# Altium PCB PCB1.pcbdoc
Units mil, origin at the board's own origin, x right, y up, seen from the top; angles counter-clockwise.
Board outline 6000 x 4000 mil, 2 copper layers (Top Layer, Bottom Layer); 25 components, 0 nets, 168 pads, 7 vias.
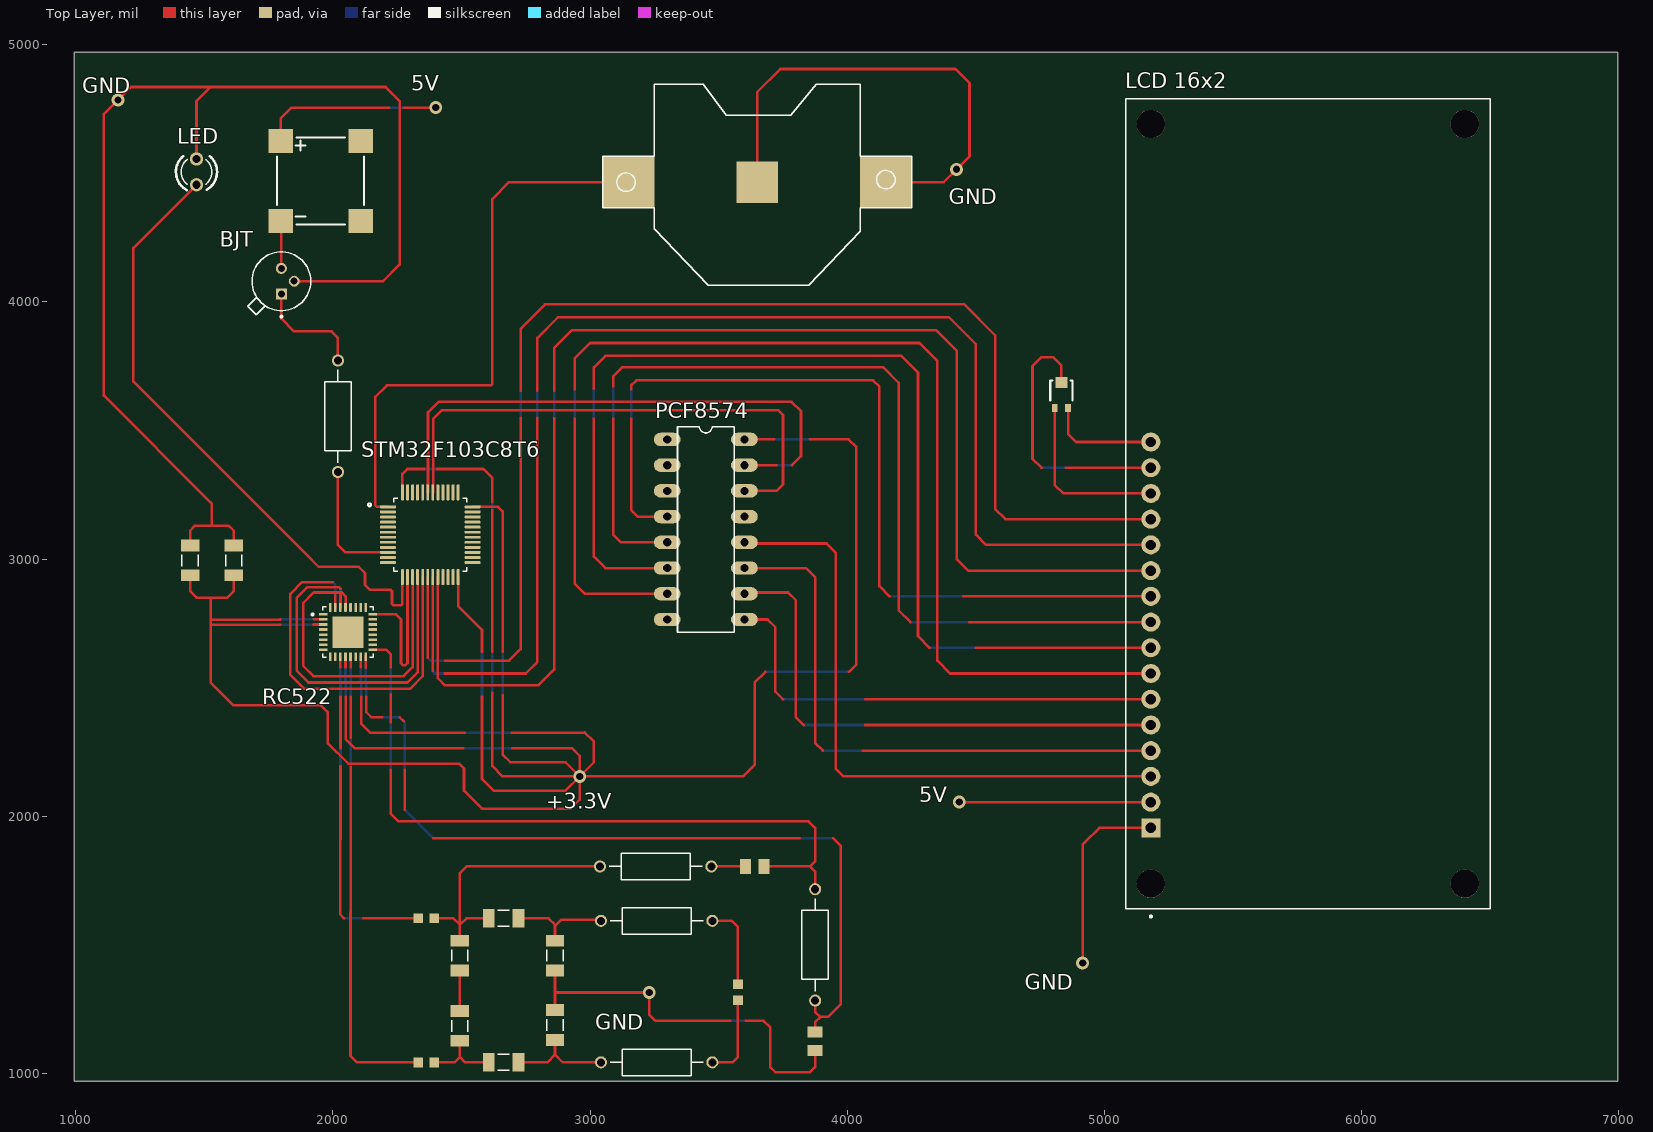
[diagram p0: Top Layer view]
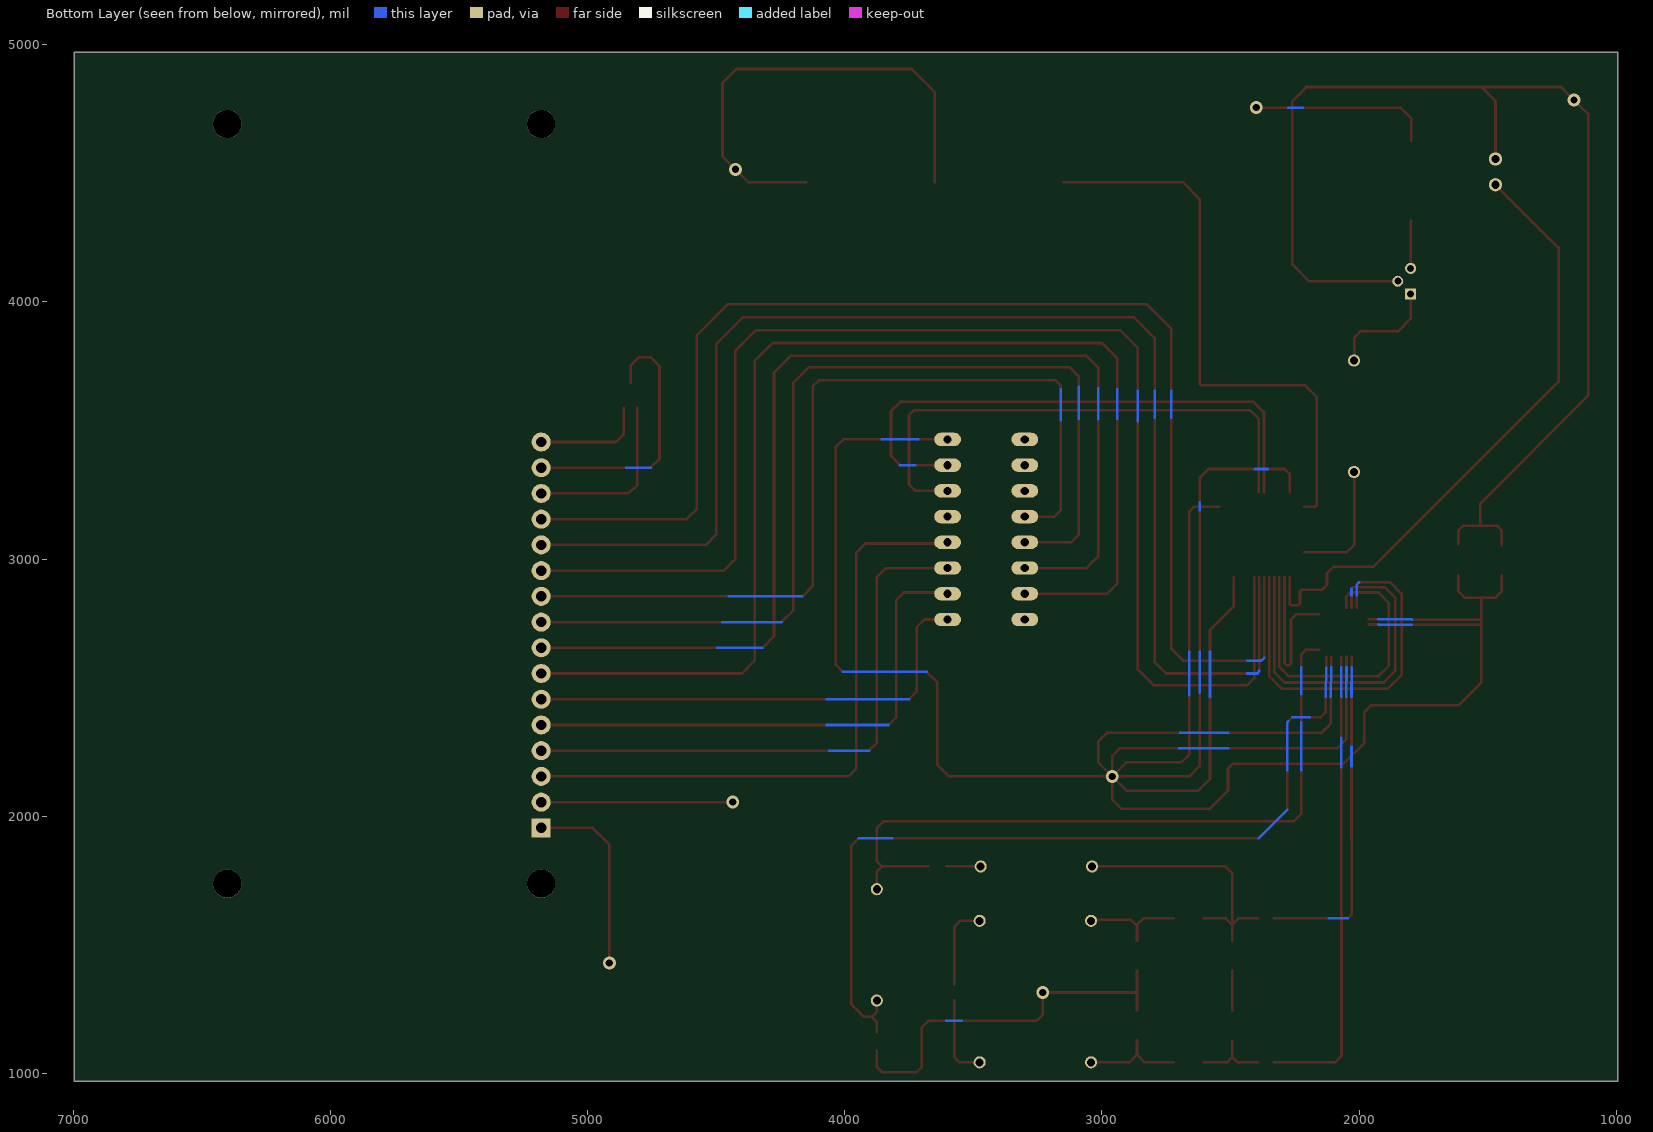
[diagram p1: Bottom Layer view, seen from below]

## Layer stack, top to bottom
Top Solder: solder mask 0.4, Solder Resist, Dk 3.5
Top Layer: signal copper 1.4
Dielectric 1: dielectric 12.6, FR-4, Dk 4.8
Bottom Layer: signal copper 1.4
Bottom Solder: solder mask 0.4, Solder Resist, Dk 3.5

## Board outline
995,970 6995,970 6995,4970 995,4970

## Design rules (kind name [scope] priority, off if disabled: settings)
Clearance [All] p1: gap=10 ignorepadtopadclearanceinfootprint=FALSE except(0: Arc-Hole Track-Hole SMDPad-Hole THPad-Hole Via-Hole Fill-Hole Poly-Hole Region-Hole Text-Hole)
PolygonConnect [All] p1: connectstyle=Relief reliefconductorwidth=10 reliefentries=4 polygonreliefangle="90 Angle" airgapwidth=10
RoutingVias [All] p1: holewidth=28 width=50 viastyle="Through Hole" minholewidth=28 minwidth=50 maxholewidth=28 maxwidth=50
SolderMaskExpansion [All] p1: expansion=4 istentingtop=FALSE
Width [All] p1: maxlimit=10 minlimit=10 preferedwidth=10
30 further rules are at their usual default settings.

## Components (designator, comment, footprint, x,y, rotation, side; value= is the part's Value field where it differs from the comment)
BJT "Comment" TO127P580H530-3 1800,4080 r90 top
"LCD 16x2" "Comment" MODULE_LCD-16X2 5790.24,3214.84 r90 top
LED "Comment" LED3MM 1470,4505 r90 top
PCF8574 "Comment" *DIL16 3450,3115 r270 top
RC522 "Comment" QFN50P500X500X100-33N 2059.13,2716.1 r0 top
STM32F103C8T6 "Comment" QFP50P900X900X160-48N 2378.9,3094.57 r0 top
? "Comment" CR2032-SMD 3650,4465 r0 top
? "Comment" RESAD1100W55L680D260 3875,1500 r90 top
? "Comment" CAPC2012X100N 3875,1125 r90 top
? "Comment" CAPC2012X100N 3640,1805 r0 top
? "Comment" RESAD1100W55L680D260 3255,1805 r0 top
? "Comment" INDC1608X95N 3575,1315 r90 top
? "Comment" RESAD1100W55L680D260 3258.87,1043.41 r0 top
? "Comment" RESAD1100W55L680D260 3258.87,1593.41 r0 top
? "Comment" CAPC3216X120N 2493.87,1185.34 r90 top
? "Comment" CAPC3216X120N 2493.87,1458.41 r90 top
? "Comment" CAPC3216X120N 2863.87,1188.41 r90 top
? "Comment" CAPC3216X120N 2863.87,1458.41 r90 top
? "Comment" CAPC3216X120N 2663.87,1043.41 r0 top
? "Comment" CAPC3216X120N 2663.87,1603.41 r0 top
? "Comment" INDC1608X95N 2363.87,1043.41 r0 top
? "Comment" INDC1608X95N 2363.87,1603.41 r0 top
? "Comment" CAPC3216X120N 1615,2995 r90 top
? "Comment" CAPC3216X120N 1445,2995 r90 top
? "Comment" RESAD1100W55L680D260 2020,3555 r90 top

## Footprints (in the part's own frame and the unit in brackets; to place one, negate y for a bottom-side part, rotate by r counter-clockwise, add the part's x,y. Pads: shape width x height; smd on the part's side, far side on the other; paste and mask are expansions set on the pad)
*DIL16 [mil]
  oval 52x104 hole 32: 1(-350,-150) 2(-250,-150) 3(-150,-150) 4(-50,-150) 5(50,-150) 6(150,-150) 7(250,-150) 8(350,-150) 9(350,150) 10(250,150) 11(150,150) 12(50,150) 13(-50,150) 14(-150,150) 15(-250,150) 16(-350,150)
  silkscreen extent -400,-110 400,110
CAPC2012X100N [mm]
  rect 1.1x1.47 smd: 1(-0.909,0) 2(0.909,0)
  body extent -1,-0.63 1,0.63, height 1
CAPC3216X120N [mm]
  rect 1.16x1.82 smd: 1(-1.475,0) 2(1.475,0)
  silkscreen extent -0.57,-0.8 0.57,0.8, body extent -1.6,-0.8 1.6,0.8, height 1.8
CR2032-SMD [mil]
  rect 200x200 smd: +$1(-500,0) +$2(500,0)
  rect 160x160 smd: NEG(0,0)
  silkscreen extent -600,-400 600,380
INDC1608X95N [mm]
  rect 0.94x0.97 smd: 1(-0.79,0) 2(0.79,0)
  body extent -0.8,-0.4 0.8,0.4, height 0.4
LED3MM [mil]
  round 52 hole 32: A(-50,0) K(50,0)
  silkscreen extent -71,-80 61,80, body extent -60,-62 60,62, height 240
MODULE_LCD-16X2 [mm]
  rect 1.88x1.88 / inner round 1.88 / far side rect 1.88x1.88 hole 1.016: 1(-32,15.5)
  round 1.88 hole 1.016: 2(-29.46,15.5) 3(-26.92,15.5) 4(-24.38,15.5) 5(-21.84,15.5) 6(-19.3,15.5) 7(-16.76,15.5) 8(-14.22,15.5) 9(-11.68,15.5) 10(-9.14,15.5) 11(-6.6,15.5) 12(-4.06,15.5) 13(-1.52,15.5) 14(1.02,15.5) 15(3.56,15.5) 16(6.1,15.5)
  round 2.8 hole 2.8 unplated: ""(-37.5,-15.5) ""(-37.5,15.5) ""(37.5,-15.5) ""(37.5,15.5)
  silkscreen extent -40.85,-18 40,18
QFN50P500X500X100-33N [mm]
  rrect25% 0.86x0.26 smd: 1(-2.435,1.75) 2(-2.435,1.25) 3(-2.435,0.75) 4(-2.435,0.25) 5(-2.435,-0.25) 6(-2.435,-0.75) 7(-2.435,-1.25) 8(-2.435,-1.75) 17(2.435,-1.75) 18(2.435,-1.25) 19(2.435,-0.75) 20(2.435,-0.25) 21(2.435,0.25) 22(2.435,0.75) 23(2.435,1.25) 24(2.435,1.75)
  rrect25% 0.26x0.86 smd: 9(-1.75,-2.435) 10(-1.25,-2.435) 11(-0.75,-2.435) 12(-0.25,-2.435) 13(0.25,-2.435) 14(0.75,-2.435) 15(1.25,-2.435) 16(1.75,-2.435) 25(1.75,2.435) 26(1.25,2.435) 27(0.75,2.435) 28(0.25,2.435) 29(-0.25,2.435) 30(-0.75,2.435) 31(-1.25,2.435) 32(-1.75,2.435)
  rect 3.1x3.1 smd paste-3: 33(0,0)
  silkscreen extent -3.59,-2.5 2.5,2.5
QFP50P900X900X160-48N [mm]
  rrect50% 1.56x0.28 smd: 1(-4.18,2.75) 2(-4.18,2.25) 3(-4.18,1.75) 4(-4.18,1.25) 5(-4.18,0.75) 6(-4.18,0.25) 7(-4.18,-0.25) 8(-4.18,-0.75) 9(-4.18,-1.25) 10(-4.18,-1.75) 11(-4.18,-2.25) 12(-4.18,-2.75) 25(4.18,-2.75) 26(4.18,-2.25) 27(4.18,-1.75) 28(4.18,-1.25) 29(4.18,-0.75) 30(4.18,-0.25) 31(4.18,0.25) 32(4.18,0.75) 33(4.18,1.25) 34(4.18,1.75) 35(4.18,2.25) 36(4.18,2.75)
  rrect50% 0.28x1.56 smd: 13(-2.75,-4.18) 14(-2.25,-4.18) 15(-1.75,-4.18) 16(-1.25,-4.18) 17(-0.75,-4.18) 18(-0.25,-4.18) 19(0.25,-4.18) 20(0.75,-4.18) 21(1.25,-4.18) 22(1.75,-4.18) 23(2.25,-4.18) 24(2.75,-4.18) 37(2.75,4.18) 38(2.25,4.18) 39(1.75,4.18) 40(1.25,4.18) 41(0.75,4.18) 42(0.25,4.18) 43(-0.25,4.18) 44(-0.75,4.18) 45(-1.25,4.18) 46(-1.75,4.18) 47(-2.25,4.18) 48(-2.75,4.18)
  silkscreen extent -6.15,-3.6 3.6,3.6, body extent -4.5,-4.5 4.5,4.5, height 1.6
RESAD1100W55L680D260 [mm]
  round 1.2 hole 0.8: 1(-5.5,0) 2(5.5,0)
  silkscreen extent -4.58,-1.3 4.58,1.3, body extent -5.77,-1.2 5.77,1.2, height 2.4
TO127P580H530-3 [mm]
  rect 1.09x1.09 / inner round 1.09 / far side rect 1.09x1.09 hole 0.69: 1(-1.27,0)
  round 1.09 hole 0.69: 2(0,-1.27) 3(1.27,0)
  silkscreen extent -3.6,-2.9 2.9,3.31, body extent -3.27,-2.9 2.9,3.27, height 18

## Free pads (board coordinates)
  rect 22.64x31.5 smd: 1(4806.24,3587.95) 3(4858.41,3587.95)
  rect 47.24x43.31 smd: 2(4832.32,3686.38)
  rect 94.49x94.49 smd: +(1797.09,4625.51) -(1797.09,4314.49) NC(2108.11,4314.49) NC(2108.11,4625.51)

## Via types
v1: diameter 50, hole 28, Top Layer to Bottom Layer, 6 vias
v2: diameter 50/50 (per signal layer), hole 28, Top Layer to Bottom Layer, 1 vias

## Nets (pads, with @x,y where several pads share a name; then routed paths per layer and width w, separated by ;. In a path a pad name is that pad's centre, name@x,y a point inside that pad or via, vN(x,y) a via of type N, cw(c..) or ccw(c..) an arc to the next point about the centre after c; other vN are vias at no path point)
pads on no net: "LCD 16x2.1" "LCD 16x2.2" "LCD 16x2.3" "LCD 16x2.4" "LCD 16x2.5" "LCD 16x2.6" "LCD 16x2.7" "LCD 16x2.8" "LCD 16x2.9" "LCD 16x2.10" "LCD 16x2.11" "LCD 16x2.12" "LCD 16x2.13" "LCD 16x2.14" "LCD 16x2.15" "LCD 16x2.16" "LCD 16x2." ?.1 ?.2 ?.+$1 ?.+$2 ?.NEG BJT.1 BJT.2 BJT.3 LED.A LED.K PCF8574.1 PCF8574.2 PCF8574.3 PCF8574.4 PCF8574.5 PCF8574.6 PCF8574.7 PCF8574.8 PCF8574.9 PCF8574.10 PCF8574.11 PCF8574.12 PCF8574.13 PCF8574.14 PCF8574.15 PCF8574.16 RC522.1 RC522.2 RC522.3 RC522.4 RC522.5 RC522.6 RC522.7 RC522.8 RC522.9 RC522.10 RC522.11 RC522.12 RC522.13 RC522.14 RC522.15 RC522.16 RC522.17 RC522.18 RC522.19 RC522.20 RC522.21 RC522.22 RC522.23 RC522.24 RC522.25 RC522.26 RC522.27 RC522.28 RC522.29 RC522.30 RC522.31 RC522.32 RC522.33 STM32F103C8T6.1 STM32F103C8T6.2 STM32F103C8T6.3 STM32F103C8T6.4 STM32F103C8T6.5 STM32F103C8T6.6 STM32F103C8T6.7 STM32F103C8T6.8 STM32F103C8T6.9 STM32F103C8T6.10 STM32F103C8T6.11 STM32F103C8T6.12 STM32F103C8T6.13 STM32F103C8T6.14 STM32F103C8T6.15 STM32F103C8T6.16 STM32F103C8T6.17 STM32F103C8T6.18 STM32F103C8T6.19 STM32F103C8T6.20 STM32F103C8T6.21 STM32F103C8T6.22 STM32F103C8T6.23 STM32F103C8T6.24 STM32F103C8T6.25 STM32F103C8T6.26 STM32F103C8T6.27 STM32F103C8T6.28 STM32F103C8T6.29 STM32F103C8T6.30 STM32F103C8T6.31 STM32F103C8T6.32 STM32F103C8T6.33 STM32F103C8T6.34 STM32F103C8T6.35 STM32F103C8T6.36 STM32F103C8T6.37 STM32F103C8T6.38 STM32F103C8T6.39 STM32F103C8T6.40 STM32F103C8T6.41 STM32F103C8T6.42 STM32F103C8T6.43 STM32F103C8T6.44 STM32F103C8T6.45 STM32F103C8T6.46 STM32F103C8T6.47 STM32F103C8T6.48
copper on no net: | length 93952
  Top Layer w10: 1445,2936.93 1445,2875 1470,2850 1575,2850 1590,2850 1615,2875 1615,2936.93 ; 1445,3053.07 1445,3110 1465,3130 1540,3130 1595,3130 1615,3110 1615,3057.48 ; 1470,4455 1225,4210 1225,3690 1895,3020 1945,2970 2010,2970 2100,2970 2125,2945 2125,2900 2145,2880 2224.14,2880 2230,2874.14 2230,2825.86 2235.86,2820 2264.77,2820 2270.63,2825.86 2270.63,2930 ; 1470,4555 1470,4780 1525,4835 ; 1525,2745 1795,2745 ; 1525,2749.66 1525,2519.6 1612.57,2432.03 1952.97,2432.03 1980,2405 1980,2285 2060,2205 2490,2205 2510,2185 2510,2100 2580,2030 2925,2030 2960,2065 v2(2960,2155) ; 1525,2750 1525,2758.28 ; 1525,2850 1525,2758.28 ; 1530,3130 1530,3215 1525,3220 1110,3635 1110,4730 v1(1165,4785) 1215,4835 1290,4835 1525,4835 ; 1795,2765 1530.86,2764.14 1525,2758.28 ; 1797.09,4314.49 1800,4311.57 1800,4215.83 1800,4130 ; 1797.09,4625.51 1797.09,4712.09 1840,4755 2220,4755 ; 1800,4030 1800,3935 1850,3885 1995,3885 2020,3860 2020,3771.54 ; 1850,4080 2195,4080 2260,4145 2260,4780 2205,4835 1525,4835 ; 1925,2745.63 1963.27,2745.63 ; 1925.32,2765.32 1963.27,2765.32 ; 2000,2910 1880,2910 1835,2865 1835,2550 1890,2495 2300,2495 2349.37,2544.37 2349.37,2930 ; 2010,2810 2010,2860 ; 2010,2890 2024.14,2890 ; 2015,2890 1945,2890 1900,2890 1860,2850 1860,2565 1905,2520 2290,2520 2329.68,2559.68 2329.68,2930 ; 2020,3338.46 2020,3283.46 2020,3055 2049.33,3025.67 2214.33,3025.67 ; 2025,2890 2030,2885 ; 2029.61,2580 2029.61,2620.24 ; 2030,2195 2028.87,1618.41 2043.89,1603.39 ; 2030,2265 2030,2465 ; 2030,2810 2030,2860 ; 2049.29,2580 2049.29,2620.24 ; 2050,2465 2050,2300 2085,2265 2506.69,2265 ; 2050,2810 2050,2855 2035,2870 1925,2870 1885,2830 1885,2585 1925,2545 2275,2545 2310,2580 2310,2930 ; 2068.98,2578.98 2068.98,2620.24 ; 2070,2190 2068.87,1068.41 2093.87,1043.41 2293.87,1043.41 ; 2070,2305 2070,2465 ; 2108.35,2580 2108.35,2620.24 ; 2110,2465 2110,2360 2145,2325 2513.3,2325 ; 2118.87,1603.41 2198.87,1603.41 2268.87,1603.41 2332.77,1603.41 ; 2128.03,2578.03 2128.03,2620.24 ; 2130,2465 2130,2405 2150,2385 2192.25,2385 ; 2155,2647.2 2207.8,2647.2 2225,2630 2225,2580 ; 2155,2785 2205,2785 2235,2785 2245.86,2785 2265,2765.86 2265,2595 2273.36,2586.64 2281.64,2586.64 2290.31,2595.31 2290.31,2930 ; 2214.33,3202.83 2170.86,3202.83 2165,3208.69 2165,3630 2210,3675 2614.14,3675 2620,3680.86 2620,4400 2685,4465 2975,4465 3150,4465 ; 2225,2180 2225,2010 2255,1980 2315,1980 3850,1980 3875,1955 3875,1825 3855,1805 ; 2225,2365 2225,2475 ; 2260,2385 2275,2370 ; 2270.63,3259.13 2270.63,3330.63 2290,3350 2355,3350 ; 2275,4755 v1(2400,4755) ; 2280,2025 2280,2180 ; 2288.87,1043.41 2332.77,1043.41 ; 2369.06,2615.94 2369.06,2630.94 2369.06,2930 ; 2370,3260 2370,3570 2411.33,3611.33 3783.67,3611.33 3820,3575 3820,3410 3820,3400 3785,3365 ; 2388.74,2565 2388.74,2930 ; 2390,1915 3815,1915 ; 2390,3260 2390,3545 2424.04,3579.04 3730.96,3579.04 3750,3560 3750,3290 3725,3265 3600,3265 ; 2394.97,1043.41 2473.87,1043.41 2493.87,1063.41 ; 2394.97,1603.41 2468.87,1603.41 2493.87,1578.41 ; 2405,3350 2585,3350 2620,3315 2620,3220 ; 2408.43,2930 2408.43,2536.57 2435,2510 2800,2510 2860,2570 2860,3546.27 ; 2435,2555 2750,2555 2795,2600 2795,3548.86 ; 2436.45,2605 2685,2605 2730,2650 2730,3549.12 ; 2487.17,2930 2487.17,2817.83 2580,2725 2580,2640 ; 2493.87,1127.27 2493.87,1063.41 ; 2493.87,1243.41 2493.87,1288.41 2493.87,1400.34 ; 2493.87,1516.48 2493.87,1578.41 ; 2543.46,3202.83 2642.17,3202.83 2660,3185 2660,2640 ; 2580,2465 2580,2145 2625,2100 2905,2100 v2(2960,2155) ; 2605.8,1043.41 2513.87,1043.41 2493.87,1063.41 ; 2605.8,1603.41 2518.87,1603.41 2493.87,1578.41 ; 2620,2480 2620,2195 2660,2155 v2(2960,2155) ; 2620,2640 2620,3190 ; 2660,2470 2660,2240 2690,2210 2905,2210 v2(2960,2155) ; 2695,2325 2978.91,2325 ; 2698.43,2265 2930,2265 2960,2235 2960,2195 v2(2960,2155) ; 2721.94,1043.41 2833.87,1043.41 2863.87,1073.41 ; 2721.94,1603.41 2838.87,1603.41 2863.87,1578.41 2863.87,1573.41 ; 2730,3655.08 2730,3895 2825,3990 4455,3990 4575,3870 4575,3195 4615,3155 5180,3155 ; 2795,3655.08 2795,3860 2875,3940 4395,3940 4500,3835 4500,3095 4540,3055 5180,3055 ; 2860,3655 2860,3820 2930,3890 4345,3890 4425,3810 4425,3000 4470,2955 5180,2955 ; 2863.87,1130.34 2863.87,1073.41 ; 2863.87,1246.48 2863.87,1298.41 2863.87,1323.41 2863.87,1400.34 ; 2863.87,1315 v1(3230,1315) 3230,1230 3255,1205 3545,1205 ; 2863.87,1516.48 2863.87,1573.41 ; 2940,3545 2940,2905 2980,2865 3300,2865 ; 2940,3660 2940,3780 3000,3840 4280,3840 4350,3770 4350,2605 4400,2555 5180,2555 ; 2978.91,2326.09 3015,2290 3015,2210 v2(2960,2155) ; 3015,3545 3015,3010 3060,2965 3300,2965 ; 3015,3662.99 3015,3745 3060,3790 4210,3790 4275,3725 4275,2700 4320,2655 ; 3038.46,1805 2885,1805 2520,1805 2493.87,1778.87 2493.87,1578.41 ; 3042.33,1043.41 2978.87,1043.41 2893.87,1043.41 2863.87,1073.41 ; 3042.33,1593.41 3037.33,1598.41 2988.87,1598.41 2888.87,1598.41 2863.87,1573.41 ; 3090,3545 3090,3095 3120,3065 3300,3065 ; 3090,3671.08 3090,3710 3125,3745 4140,3745 4200,3685 4200,2800 4245,2755 ; 3160,3544.77 3160,3190 3185,3165 3300,3165 ; 3160,3661.16 3160,3675 3180,3695 4100,3695 4125,3670 4125,2897.29 ; 3471.54,1805 3560,1805 3604.21,1805 ; 3475.4,1043.41 3553.41,1043.41 3575,1065 3575,1283.9 ; 3475.4,1593.41 3551.59,1593.41 3575,1570 3575,1565 3575,1346.1 ; 3600,2765 3690,2765 3720,2735 3720,2485 3750,2455 ; 3600,2965 3840,2965 3875,2930 3875,2285 3905,2255 ; 3600,3065 3604.49,3060.51 3919.49,3060.51 3955,3025 3955,2355 3955,2255 3955,2185 3985,2155 5180,2155 ; 3600,3365 3725,3365 ; 3600,3465 3715,3465 ; 3605,1205 3675,1205 3700,1180 3700,1025 3720,1005 3855,1005 3875,1025 3875,1089.21 ; 3605,2870 3770,2870 3800.16,2839.84 3800.16,2390 3800.16,2384.84 3830,2355 ; 3650,4465 3650,4815 3740,4905 4420,4905 4475,4850 4475,4565 v1(4425,4515) 4375,4465 4150,4465 ; 3675.79,1805 3855,1805 ; 3681.55,2561.55 3640,2520 3640,2200 3595,2155 2970.82,2155 v2(2960,2155) ; 3855,3465 4005,3465 4035,3435 4035,2590 4006.55,2561.55 ; 3875,1160.79 3875,1200 3895,1220 ; 3875,1283.46 3875,1240 3895,1220 ; 3875,1716.54 3875,1785 3855,1805 ; 3945,1915 3975,1885 3975,1270 3925,1220 3895,1220 ; 4060,2255 5180,2255 ; 4070,2355 5180,2355 ; 4070,2455 5180,2455 ; 4125,2895 4165,2855 ; v1(4435,2055) 5180,2055 ; 4450,2855 5180,2855 ; 4475,2755 5180,2755 ; 4500,2655 5180,2655 ; 4720,3390 4720,3750 4755,3785 4800,3785 4832.32,3752.68 4832.32,3686.38 ; 4720.77,3389.23 4755,3355 ; 4806.24,3587.95 4806.24,3288.76 4840,3255 5180,3255 ; 4850,3355 5180,3355 ; 4858.41,3587.95 4858.41,3486.59 4890,3455 5180,3455 ; v1(4915,1430) 4915,1890 4925,1900 4980,1955 5180,1955
  Bottom Layer w10: 1795,2745 1925,2745.63 ; 1795,2765 1925.32,2765.32 ; 2000,2910 2010,2900 2010,2860 ; 2029.29,2580 2030,2465 ; 2030,2195 2030,2270 ; 2030,2860 2030,2885 ; 2043.89,1603.39 2118.87,1603.41 ; 2049.29,2580 2050,2465 ; 2068.98,2578.98 2070,2465 ; 2070,2190 2070,2255 2070,2305 ; 2108.35,2580 2110,2465 ; 2128.03,2578.03 2130,2465 ; 2191.64,2385 2255,2385 2260,2385 ; 2220,4755 2275,4755 ; 2225,2180 2225,2365 ; 2225,2475 2225,2580 ; 2275,2370 2280,2365 2280,2180 ; 2280,2025 2390,1915 ; 2355,3350 2405,3350 ; 2369.06,2615.94 2380,2605 2435,2605 ; 2388.74,2565 2395,2555 2435,2555 ; 2508.43,2265 2698.43,2265 ; 2510,2325 2695,2325 ; 2580,2465 2580,2640 ; 2620,2480 2620,2640 ; 2620,3190 2620,3220 ; 2660,2470 2660,2640 ; 2730,3550 2730,3655.08 ; 2795,3550 2795,3655.08 ; 2860,3535 2860,3655 ; 2940,3545 2940,3660 ; v2@2955,2155 v2(2960,2155) v2@2970.82,2155 ; 3015,3542.99 3015,3662.99 ; 3090,3545 3090,3669.57 ; 3160,3540 3160,3660 ; 3545,1205 3605,1205 ; 3600,2865 3605,2870 ; 3681.55,2561.55 4006.55,2561.55 ; 3715,3465 3855,3465 ; 3725,3365 3785,3365 ; 3750,2455 4070,2455 ; 3815,1915 3945,1915 ; 3830,2355 4070,2355 ; 3905,2255 4060,2255 ; 4165,2855 4175,2855 4450,2855 ; 4245,2755 4475.17,2754.83 ; 4320,2655 4495.17,2654.83 ; 4755,3355 4850,3355

## Other copper
Top Layer:

## Silkscreen, mask and mechanical layers (free items; w line width, h text height)
Top Overlay:
  lines w7.87: 1783.31,4375.51 1783.31,4564.49 ; 1854.17,4332.2 1893.54,4332.2 ; 1854.17,4607.8 1893.54,4607.8 ; 1858.11,4300.71 2047.09,4300.71 ; 1858.11,4639.29 2047.09,4639.29 ; 1873.86,4588.11 1873.86,4627.48 ; 2121.89,4375.51 2121.89,4564.49 ; 4789.02,3615.51 4789.02,3694.25 4796.89,3694.25 ; 4867.76,3694.25 4875.63,3694.25 4875.63,3615.51
  text "5V" at 2305,4820 h60
  text "GND" at 1025,4810 h60
  text "GND" at 4395,4380 h60
  text "5V" at 4280,2055 h60
  text "+3.3V" at 2830,2030 h60
  text "GND" at 4690,1325 h60
  text "GND" at 3020,1170 h60
Mechanical 13:
  lines w3.94: 1785.28,4302.68 1785.28,4637.32 2119.92,4637.32 2119.92,4302.68 1785.28,4302.68
Mechanical 15:
  lines w1.97: 1741.97,4680.63 2163.23,4680.63 ; 1751.97,4680.63 1751.97,4259.37 2173.23,4259.37 2173.23,4680.63
  lines w3.94: 1932.91,4470 1972.28,4470 ; 1952.6,4450.31 1952.6,4489.69
  lines w7.87: 4812.64,3639.13 4852.01,3639.13 ; 4832.32,3619.45 4832.32,3658.82 ; 4777.2,3556.46 4887.44,3556.46 4887.44,3721.81 4777.2,3721.81 4777.2,3556.46